# Altium PCB old.PcbDoc
Units mil, origin at the board's own origin, x right, y up, seen from the top; angles counter-clockwise.
Board outline 1180 x 2621.21 mil, 4 copper layers (Top Layer, GND, 3v3, Bottom Layer), stack 23.756 mil thick; 53 components, 48 nets, 259 pads, 57 vias.
Unrouted connection lines stored in the file: 4.
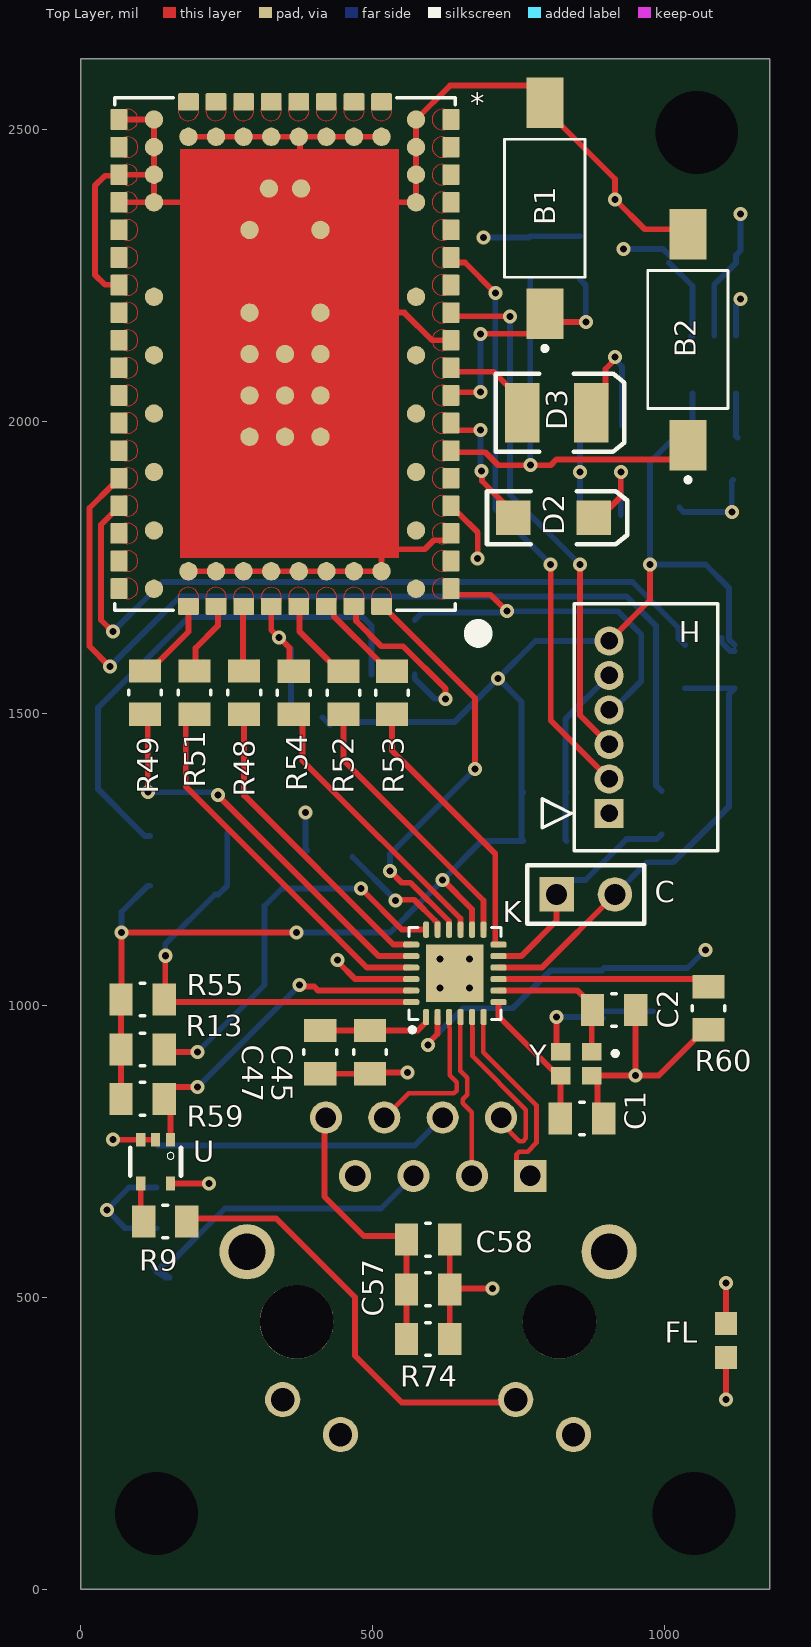
[diagram p0: Top Layer view]
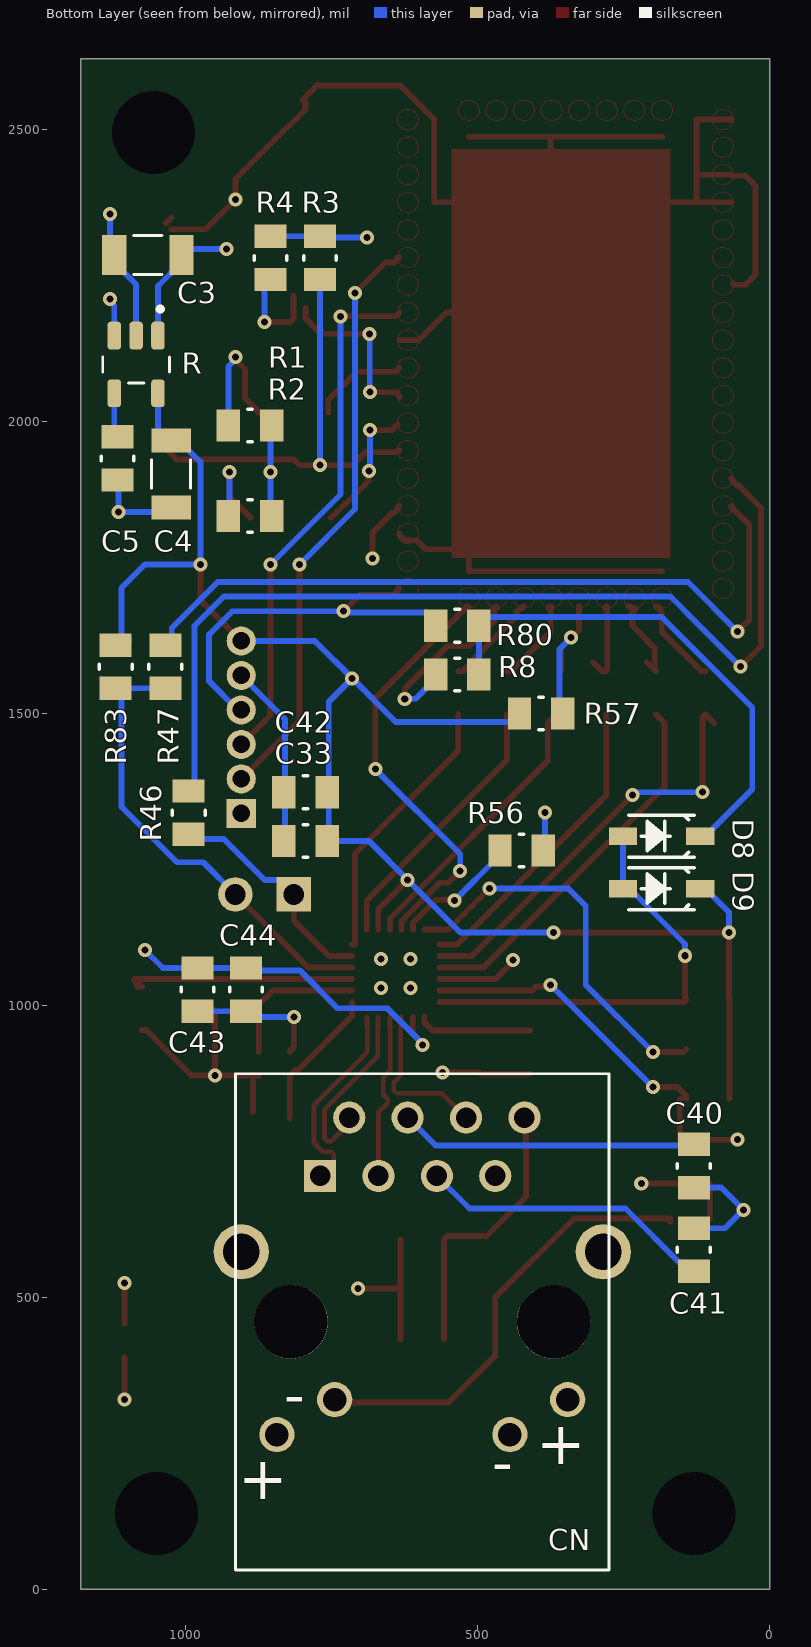
[diagram p1: Bottom Layer view, seen from below]
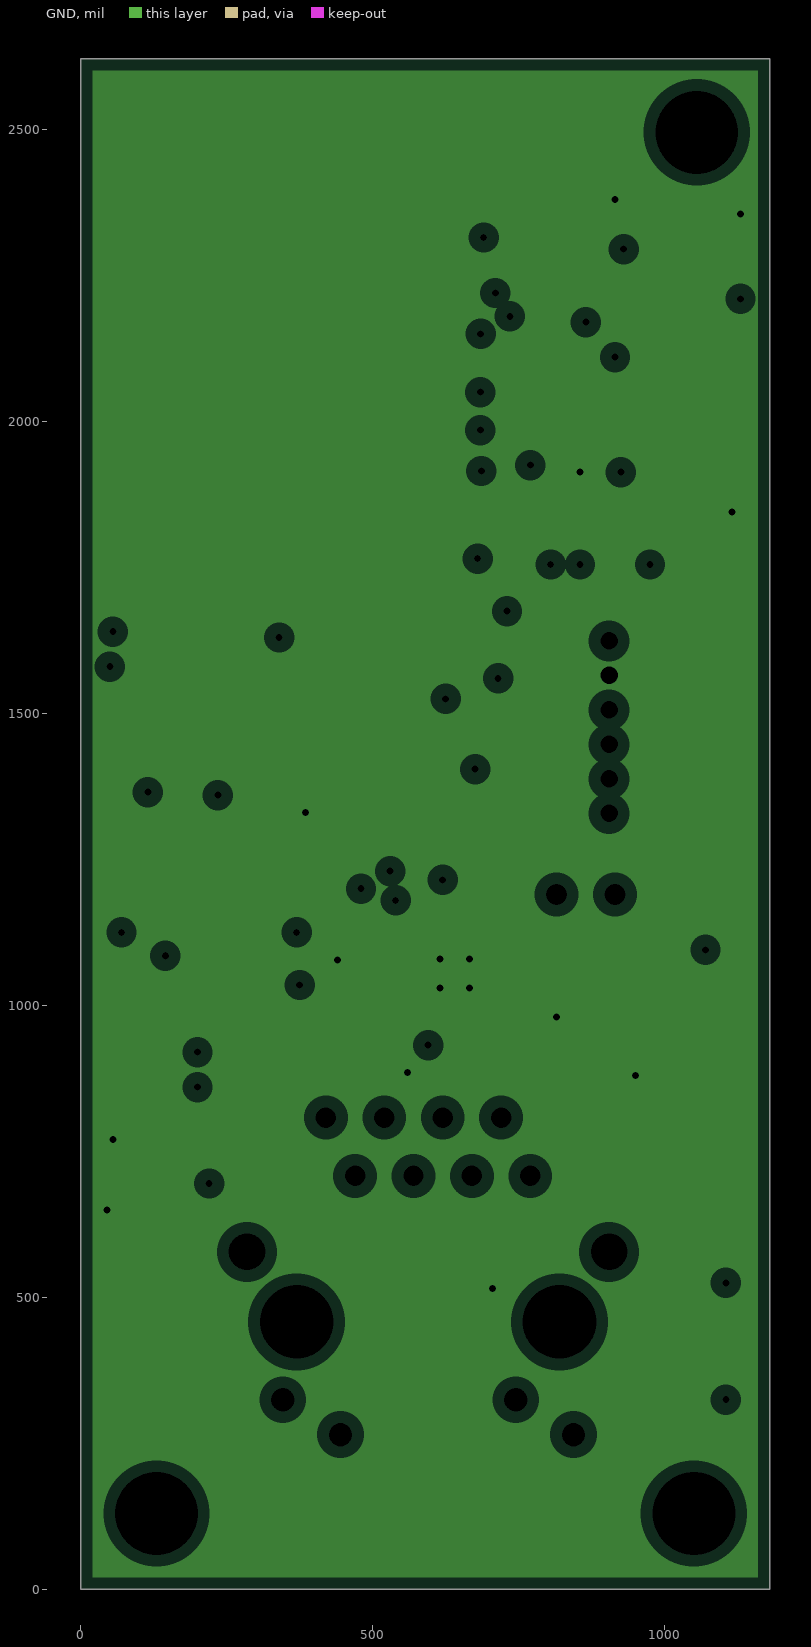
[diagram p2: GND, clearances drawn from the general rule]
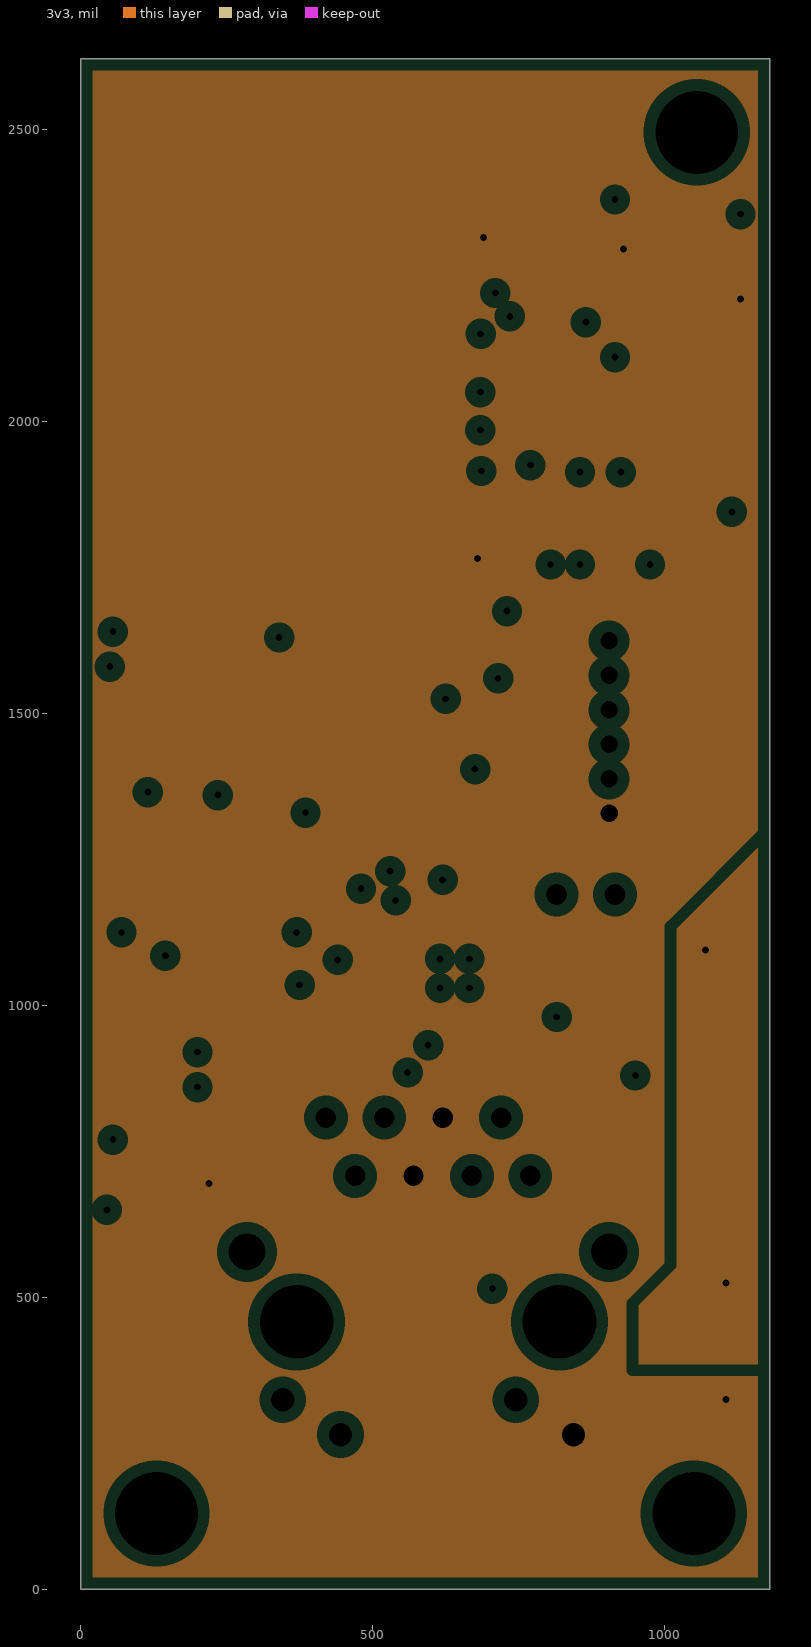
[diagram p3: 3v3, clearances drawn from the general rule]

## Layer stack, top to bottom
Top Solder: solder mask 0.4, Solder Resist, Dk 3.5
Top Layer: signal copper 1.4
Dielectric 2: prepreg 2.8, PP-006, Dk 4.1
GND: plane copper 1.378, net GND
Dielectric 1: dielectric 12.6, FR-4, Dk 4.8
3v3: plane copper 1.378, net 3v3
Dielectric 3: prepreg 2.8, PP-006, Dk 4.1
Bottom Layer: signal copper 1.4
Bottom Solder: solder mask 0.4, Solder Resist, Dk 3.5

## Board outline
0,2621.21 0,0 1180,0 1180,2621.21

## Design rules (kind name [scope] priority, off if disabled: settings)
Clearance [All] p1: gap=5 ignorepadtopadclearanceinfootprint=FALSE // Default=10mil
DiffPairsRouting [All] p1: maxlimit=10 minlimit=10 mostfreqgap=10 toplayer_minwidth=8 toplayer_maxwidth=15 toplayer_prefwidth=15 bottomlayer_minwidth=10 bottomlayer_maxwidth=15 bottomlayer_prefwidth=15 maxuncoupledlength=500 // DefaultMinWidth=15mil
HoleSize [All] p1: absolutevalues=TRUE maxlimit=150 minlimit=1 maxpercent=80.000 minpercent=20.000 // MaximumDefault=100mil
MinimumSolderMaskSliver [All] p1: minsoldermaskwidth=1 // Default=10mil
PlaneClearance [All] p1: clearance=20
PlaneConnect [All] p1: planeconnectstyle=Relief reliefexpansion=20 reliefentries=4 reliefconductorwidth=10 reliefairgap=10
PolygonConnect [All] p1: connectstyle=Relief reliefconductorwidth=10 reliefentries=4 polygonreliefangle="90 Angle" airgapwidth=10
RoutingVias [All] p1: holewidth=28 width=50 viastyle="Through Hole" minholewidth=28 minwidth=50 maxholewidth=28 maxwidth=50
SilkToSolderMaskClearance [IsPad] p1: minsilkscreentomaskgap=4 clearancetoexposedcopper=TRUE // Default=10mil
SolderMaskExpansion [All] p1: expansion=4 istentingtop=FALSE
Width [All] p1: maxlimit=10 minlimit=8 preferedwidth=10 minimp=50.000000 maximp=50.000000 favimp=50.000000 // MinWidthDefault=10mil
24 further rules are at their usual default settings.

## Classes and differential pairs
differential pair PHY_TX: +PHY_TX_P -PHY_TX_N
differential pair PHY_RX: +PHY_RX_P -PHY_RX_N

## Components (designator, comment, footprint, x,y, rotation, side; value= is the part's Value field where it differs from the comment)
* "ODIN-W262" ODIN-W262 349.95,2115.35 r90 top
B1 "push button" TECO-FSMSM 795,2365 r90 top
B2 "push button" TECO-FSMSM 1040,2140 r90 top
C "Header 2" HDR1X2 815,1190 r0 top
C1 "22uF 10V" 0805 858.55,806.51 r0 top value=22uF
C2 "22uF 10V" 0805 913.55,992.31 r0 top value=22uF
C3 "10UF 25V" 1206 1065,2285 r0 bottom value=10uF
C4 "10UF 25V" 1206 1025,1910 r270 bottom value=10uF
C5 "10nF 50V" 0805 1117,1936.69 r270 bottom value=10nF
C33 "2.2uF 16V" 0805 795,1281.72 r180 bottom value=2.2uF
C40 "100nF 50V" 0805 130,725 r90 bottom value=100nF
C41 "100nF 50V" 0805 130,581.49 r270 bottom value=100nF
C42 "100nF 50V" 0805 795,1365 r180 bottom value=100nF
C43 "2.2uF 16V" 0805 980,1027 r90 bottom value=2.2uF
C44 "100nF 50V" 0805 896.72,1027 r90 bottom value=100nF
C45 "100nF 50V" 0805 495.32,920 r90 top value=100nF
C47 "100nF 50V" 0805 410.32,920 r90 top value=100nF
C57 "100nF 50V" 0805 595,513.79 r0 top value=100nF
C58 "100nF 50V" 0805 595,598.79 r0 top value=100nF
CN "CN J00-0045NL" "RJ45 J00-0045NL" 595,457.91 r0 bottom
D2 "LED2" 3.2X1.6X1.1 810,1835 r0 top
D3 "LED3" 3.5X2.8X1.9 815,2015 r0 top
D8 "SM5817PL-TP" SOD-123 185,1290 r0 bottom
D9 "SM5817PL-TP" SOD-123 185,1200 r0 bottom
FL "BLM18PG300SN1D" BEADC1608X95N 1105,426.06 r90 top
H "S6B-ZR(LF)(SN)" S6B-ZR_JST 905,1328.78 r90 top
K "KSZ8081RNAIA-TR" QFN50P400X400X90-25N 640.79,1054.8 r90 top
R "LP2992IM5-1.8" SOT95P280X145-5N 1085,2097.5 r270 bottom
R1 "270" 0805 890,1993 r0 bottom
R2 "270" 0805 890,1838 r0 bottom
R3 "1k" 0805 770,2280 r90 bottom
R4 "1k" 0805 855,2280 r90 bottom
R8 "JUMPER" 0805 535,1566.72 r0 bottom value=0
R9 "120" 0805 145,630 r180 top
R13 "1k" 0805 106,924.46 r180 top
R46 "10.0" 0805 995,1330 r90 bottom
R47 "10.0" 0805 1035,1580 r90 bottom
R48 "10.0" 0805 280,1535.63 r270 top
R49 "10.0" 0805 110,1535.63 r270 top
R51 "10.0" 0805 195,1535.63 r270 top
R52 "10.0" 0805 450,1535.24 r90 top
R53 "10.0" 0805 533.28,1535.24 r90 top
R54 "10.0" 0805 365,1535.24 r90 top
R55 "1k" 0805 106,1010 r180 top
R56 "1k" 0805 425,1265 r180 bottom
R57 "1k" 0805 391.49,1500 r180 bottom
R59 "1k" 0805 106,840 r0 top
R60 "6.8k" 0805 1075,995 r90 top
R74 "16m" 0805 595,428.79 r180 top
R80 "JUMPER" 0805 535,1650 r0 bottom value=0
R83 "4.7k" 0805 1120,1580 r270 bottom
U "NC7SZ125" SC70-5 128.41,732.4 r180 top
Y "ECS-250-10-37-JTN-TR" XTAL_ECS-250-10-37-JTN-TR 848.55,900 r180 top

## Footprints (in the part's own frame and the unit in brackets; to place one, negate y for a bottom-side part, rotate by r counter-clockwise, add the part's x,y. Pads: shape width x height; smd on the part's side, far side on the other; paste and mask are expansions set on the pad)
3.2X1.6X1.1 [mm]
  rect 1.5x1.5 smd: 1(-1.75,0) 2(1.75,0)
  silkscreen extent -2.9,-1.15 3.2,1.15
3.5X2.8X1.9 [mm] "SM LED; 2 C-Bend Leads; Body 3.5 x 2.8 x 1.9 mm, inc leads (LxWxH typ)"
  rect 1.5x2.6 smd: 1(-1.5,0) 2(1.5,0)
  silkscreen extent -2.65,-1.7 2.95,1.7
0805 [mil]
  rect 40x55 smd: 1(-37,0) 2(37,0)
  silkscreen extent -4,-28 4,28
1206 [mm]
  rect 1.05x1.72 smd: 1(-1.46,0) 2(1.46,0)
  silkscreen extent -0.62,-0.85 0.62,0.85
BEADC1608X95N [mm]
  rect 1x0.97 smd: 1(-0.735,0) 2(0.735,0)
HDR1X2 [mm] "Connector; Header; 2 Position"
  rect 1.5x1.5 hole 0.9: 1(0,0)
  round 1.5 hole 0.9: 2(2.54,0)
  silkscreen extent -1.27,-1.27 3.81,1.27
ODIN-W262 [mm]
  round 0.8 smd: 1(6.6,-5.7) 2(7.8,-5.7) 3(9,-5.7) 4(10.2,-5.7) 5(9.45,-4.2) 6(9.45,-3) 7(9.45,-1.8) 8(9.45,-0.6) 9(9.45,0.6) 10(9.45,1.8) 11(9.45,3) 12(9.45,4.2) 13(10.2,5.7) 14(9,5.7) 15(7.8,5.7) 16(6.6,5.7) 17(-9.45,4.2) 18(-9.45,3) 19(-9.45,1.8) 20(-9.45,0.6) 21(-9.45,-0.6) 22(-9.45,-1.8) 23(-9.45,-3) 24(-9.45,-4.2) 25(-3.6,-1.54) 26(-1.8,-1.54) 27(0,-1.54) 28(1.8,-1.54) 29(5.4,-1.54) 30(7.2,-0.7) 31(-3.6,0) 32(-1.8,0) 33(0,0) 34(-3.6,1.54) 35(-1.8,1.54) 36(0,1.54) 37(1.8,1.54) 38(5.4,1.54) 39(7.2,0.7) TP1(2.49,-5.7) TP2(2.49,5.7) TP3(-0.05,-5.7) TP4(-0.05,5.7) TP5(-2.59,-5.7) TP6(-2.59,5.7) TP7(-5.13,-5.7) TP8(-5.13,5.7) TP9(-7.67,-5.7) TP10(-7.67,5.7) TP11(-10.21,-5.7) TP12(-10.21,5.7)
  rrect15% 0.9x0.75 smd paste-1 mask+0: A1(-10.2,-7.225) A2(-9,-7.225) A3(-7.8,-7.225) A4(-6.6,-7.225) A5(-5.4,-7.225) A6(-4.2,-7.225) A7(-3,-7.225) A8(-1.8,-7.225) A9(-0.6,-7.225) A10(0.6,-7.225) A11(1.8,-7.225) A12(3,-7.225) A13(4.2,-7.225) A14(5.4,-7.225) A15(6.6,-7.225) A16(7.8,-7.225) A17(9,-7.225) A18(10.2,-7.225) C1(10.2,7.225) C2(9,7.225) C3(7.8,7.225) C4(6.6,7.225) C5(5.4,7.225) C6(4.2,7.225) C7(3,7.225) C8(1.8,7.225) C9(0.6,7.225) C10(-0.6,7.225) C11(-1.8,7.225) C12(-3,7.225) C13(-4.2,7.225) C14(-5.4,7.225) C15(-6.6,7.225) C16(-7.8,7.225) C17(-9,7.225) C18(-10.2,7.225)
  rrect15% 0.75x0.9 smd paste-1 mask+0: B1(10.975,-4.2) B2(10.975,-3) B3(10.975,-1.8) B4(10.975,-0.6) B5(10.975,0.6) B6(10.975,1.8) B7(10.975,3) B8(10.975,4.2) D1(-10.975,4.2) D2(-10.975,3) D3(-10.975,1.8) D4(-10.975,0.6) D5(-10.975,-0.6) D6(-10.975,-1.8) D7(-10.975,-3) D8(-10.975,-4.2)
  Top Layer circle w0: c10.2,6.85 r0.45
  Top Layer circle w0: c4.2,-6.85 r0.45
  Top Layer circle w0: c3,-6.85 r0.45
  Top Layer circle w0: c5.4,-6.85 r0.45
  Top Layer circle w0: c6.6,-6.85 r0.45
  Top Layer circle w0: c7.8,-6.85 r0.45
  Top Layer circle w0: c9,-6.85 r0.45
  Top Layer circle w0: c10.2,-6.85 r0.45
  Top Layer circle w0: c-9,-6.85 r0.45
  Top Layer circle w0: c-5.4,-6.85 r0.45
  Top Layer circle w0: c1.8,6.85 r0.45
  Top Layer circle w0: c0.6,6.85 r0.45
  Top Layer circle w0: c-0.6,6.85 r0.45
  Top Layer circle w0: c-1.8,6.85 r0.45
  Top Layer circle w0: c-3,6.85 r0.45
  Top Layer circle w0: c-4.2,6.85 r0.45
  Top Layer circle w0: c-7.8,6.85 r0.45
  Top Layer circle w0: c-9,6.85 r0.45
  Top Layer circle w0: c-10.2,6.85 r0.45
  Top Layer circle w0: c9,6.85 r0.45
  Top Layer circle w0: c5.4,6.85 r0.45
  Top Layer circle w0: c4.2,6.85 r0.45
  Top Layer circle w0: c10.6,-4.2 r0.45
  Top Layer circle w0: c10.6,-3 r0.45
  Top Layer circle w0: c10.6,-1.8 r0.45
  Top Layer circle w0: c10.6,-0.6 r0.45
  Top Layer circle w0: c10.6,0.6 r0.45
  Top Layer circle w0: c10.6,1.8 r0.45
  Top Layer circle w0: c10.6,3 r0.45
  Top Layer circle w0: c10.6,4.2 r0.45
  Top Layer lines w0: -4.2,-7.3 cw(c-4.2,-6.85) -4.27,-7.295 cw(c-4.2,-6.85) -4.169,-7.299 cw(c-4.2,-6.85) -4.2,-7.3 ; -4.2,-7.3 ccw(c-4.2,-6.85) -4.2,-7.3 ; -5.414,7.3 ccw(c-5.4,6.85) -5.486,7.292 ccw(c-5.4,6.85) -5.667,6.488 ccw(c-5.4,6.85) -5.4,6.4 ccw(c-5.4,6.85) -5.414,7.3 ; 2.968,7.299 cw(c3,6.85) 3.07,7.295 cw(c3,6.85) 3.131,7.281 cw(c3,6.85) 3,6.4 cw(c3,6.85) 2.968,7.299 ; 7.756,7.298 cw(c7.8,6.85) 7.8,6.4 cw(c7.8,6.85) 7.669,7.281 cw(c7.8,6.85) 7.756,7.298 ; 6.53,7.295 cw(c6.6,6.85) 6.6,6.4 cw(c6.6,6.85) 6.53,7.295 ; -6.731,7.281 cw(c-6.6,6.85) -6.6,6.4 cw(c-6.6,6.85) -6.731,7.281 ; -11.031,4.331 cw(c-10.6,4.2) -10.6,3.75 cw(c-10.6,4.2) -11.045,4.13 cw(c-10.6,4.2) -11.05,4.2 cw(c-10.6,4.2) -11.05,4.207 cw(c-10.6,4.2) -11.047,4.251 cw(c-10.6,4.2) -11.045,4.27 cw(c-10.6,4.2) -11.042,4.286 cw(c-10.6,4.2) -11.031,4.331 ; -11.031,3.131 ccw(c-10.6,3) -11.037,3.107 ccw(c-10.6,3) -11.045,3.07 ccw(c-10.6,3) -11.05,3 ccw(c-10.6,3) -10.6,2.55 ccw(c-10.6,3) -11.031,3.131 ; -11.05,1.8 cw(c-10.6,1.8) -10.6,1.35 cw(c-10.6,1.8) -11.045,1.73 cw(c-10.6,1.8) -11.05,1.8 ; -11.047,0.651 cw(c-10.6,0.6) -10.6,0.15 cw(c-10.6,0.6) -11.031,0.469 cw(c-10.6,0.6) -11.05,0.6 cw(c-10.6,0.6) -11.047,0.651 ; -11.05,-0.6 ccw(c-10.6,-0.6) -11.05,-0.619 ccw(c-10.6,-0.6) -11.031,-0.731 ccw(c-10.6,-0.6) -10.6,-1.05 ccw(c-10.6,-0.6) -11.05,-0.6 ; -11.048,-1.762 cw(c-10.6,-1.8) -10.6,-2.25 cw(c-10.6,-1.8) -11.031,-1.931 cw(c-10.6,-1.8) -11.039,-1.901 cw(c-10.6,-1.8) -11.045,-1.87 cw(c-10.6,-1.8) -11.05,-1.8 cw(c-10.6,-1.8) -11.048,-1.762 ; -11.031,-2.869 cw(c-10.6,-3) -10.6,-3.45 cw(c-10.6,-3) -11.031,-3.131 cw(c-10.6,-3) -11.034,-3.118 cw(c-10.6,-3) -11.042,-3.086 cw(c-10.6,-3) -11.043,-3.076 cw(c-10.6,-3) -11.049,-3.032 cw(c-10.6,-3) -11.05,-3 cw(c-10.6,-3) -11.031,-2.869 ; -11.05,-4.2 cw(c-10.6,-4.2) -10.6,-4.65 cw(c-10.6,-4.2) -10.975,-4.449 cw(c-10.6,-4.2) -11.031,-4.331 cw(c-10.6,-4.2) -11.05,-4.2 ; 0.6,-6.4 cw(c0.6,-6.85) 0.6,-7.3 cw(c0.6,-6.85) 0.6,-6.4 ; -8.067,-6.488 ccw(c-7.8,-6.85) -8.098,-6.513 ccw(c-7.8,-6.85) -7.8,-7.3 ccw(c-7.8,-6.85) -8.067,-6.488 ; -10.069,-7.281 cw(c-10.2,-6.85) -10.114,-7.292 cw(c-10.2,-6.85) -10.2,-7.3 cw(c-10.2,-6.85) -10.27,-7.295 cw(c-10.2,-6.85) -10.069,-7.281 ; -6.731,-7.281 ccw(c-6.6,-6.85) -6.697,-7.289 ccw(c-6.6,-6.85) -6.67,-7.295 ccw(c-6.6,-6.85) -6.613,-7.3 ccw(c-6.6,-6.85) -6.6,-7.3 ccw(c-6.6,-6.85) -6.731,-7.281 ; -3.131,-7.281 ccw(c-3,-6.85) -3.057,-7.296 ccw(c-3,-6.85) -3,-7.3 ccw(c-3,-6.85) -3.131,-7.281 ; -0.514,-7.292 ccw(c-0.6,-6.85) -0.67,-7.295 ccw(c-0.6,-6.85) -0.614,-7.3 ccw(c-0.6,-6.85) -0.6,-7.3 ccw(c-0.6,-6.85) -0.514,-7.292 ; -1.87,-7.295 ccw(c-1.8,-6.85) -1.8,-7.3 ccw(c-1.8,-6.85) -1.787,-7.3 ccw(c-1.8,-6.85) -1.73,-7.295 ccw(c-1.8,-6.85) -1.87,-7.295 ; 1.87,-7.295 ccw(c1.8,-6.85) 1.8,-7.3 ccw(c1.8,-6.85) 1.849,-7.297 ccw(c1.8,-6.85) 1.87,-7.295
  silkscreen extent -12.4,-8.65 11.15,7.4, body extent -11.15,-7.4 11.15,7.4, height 4.8
QFN50P400X400X90-25N [mm]
  rrect70% 0.71x0.27 smd: 1(-1.9,1.25) 2(-1.9,0.75) 3(-1.9,0.25) 4(-1.9,-0.25) 5(-1.9,-0.75) 6(-1.9,-1.25) 13(1.9,-1.25) 14(1.9,-0.75) 15(1.9,-0.25) 16(1.9,0.25) 17(1.9,0.75) 18(1.9,1.25)
  rrect70% 0.27x0.71 smd: 7(-1.25,-1.9) 8(-0.75,-1.9) 9(-0.25,-1.9) 10(0.25,-1.9) 11(0.75,-1.9) 12(1.25,-1.9) 19(1.25,1.9) 20(0.75,1.9) 21(0.25,1.9) 22(-0.25,1.9) 23(-0.75,1.9) 24(-1.25,1.9)
  rect 2.5x2.5 smd paste-2: 25(0,0)
  silkscreen extent -2.55,-2 2,2
"RJ45 J00-0045NL" [mm]
  rect 1.398x1.398 hole 0.89: 1(4.445,-6.35)
  round 1.398 hole 0.89: 2(3.175,-8.89) 3(1.905,-6.35) 4(0.635,-8.89) 5(-0.635,-6.35) 6(-1.905,-8.89) 7(-3.175,-6.35) 8(-4.445,-8.89)
  round 1.53 hole 1.02: 9(6.325,4.9) 10(3.81,3.38) 11(-3.81,4.9) 12(-6.325,3.38)
  round 3.2 hole 3.2 unplated: None(-5.715,0) None(5.715,0)
  round 2.4 hole 1.6: S1(-7.875,-3.05) S2(7.875,-3.05)
  silkscreen extent -8.13,-10.79 8.13,10.79
S6B-ZR_JST [mil]
  rect 50x50 hole 30 mask+0: 1(0,0)
  round 50 hole 30 mask+0: 2(59.06,0) 3(118.11,0) 4(177.17,0) 5(236.22,0) 6(295.28,0)
  silkscreen extent -64,-186 359,115, body extent 0,0 10,10, height 10
SC70-5 [mm]
  rect 0.4x0.6 smd: 1(-0.65,-0.95) 2(0,-0.95) 3(0.65,-0.95) 4(0.65,0.95) 5(-0.65,0.95)
  silkscreen extent -1.1,-0.6 1.1,0.6
SOD-123 [mil]
  rect 48x30 smd: A(66,0) C(-66,0)
  silkscreen extent -56,-36 56,36
SOT95P280X145-5N [mm]
  rrect50% 1.21x0.59 smd: 1(-1.255,0.95) 2(-1.255,0) 3(-1.255,-0.95) 4(1.255,-0.95) 5(1.255,0.95)
  silkscreen extent -2.51,-1.45 0.8,1.45
TECO-FSMSM [mm]
  rect 2.19x1.6 smd: 1(-4.59,0) 2(4.59,0)
  silkscreen extent -6.2,-1.75 3,1.75
XTAL_ECS-250-10-37-JTN-TR [mm]
  rect 0.85x0.75 smd: 1(-0.675,-0.525) 2(0.675,-0.525) 3(0.675,0.525) 4(-0.675,0.525)
  silkscreen extent -1.8,-0.55 -1.6,-0.35

## Part data
B1 B2: library part Teco-FSMSM
C: "Header, 2-Pin", LatestRevisionDate=17-Jul-2002, LatestRevisionNote="Re-released for DXP Platform.", Publisher="Altium Limited"
C1 C2: library part "CAP 22uF 10V", "CAP CER 2.2UF 10V X5R 0805", Operating Temperature="-55°C ~ 85°C", Package=0805, Rating=10V, Temperature Coefficient=X5R, Tolerance=20%
C3 C4: library part "CAP 10uF 25V", "CAP CER 10UF 25V X5R 1206", Operating Temperature="-55°C ~ 85°C", Package=1206, Rating=25V, Temperature Coefficient=X5R, Tolerance=10%
C5: library part "CAP 10nF 50V", "CAP CER 10000PF 50V X7R 0805", Operating Temperature="-55°C ~ 125°C", Package=0805, Rating=50V, Temperature Coefficient=X7R, Tolerance=10%
C33 C43: library part "CAP 2.2uF 16V", "CAP CER 2.2UF 16V X7R 0805", Operating Temperature="-55°C ~ 125°C", Package=0805, Rating=16V, Temperature Coefficient=X7R, Tolerance=10%
C40 C41 C42 C44 C45 C47 C57 C58: library part "CAP 100nF 50V", "CAP CER 0.1UF 50V X7R 0805", Package=0805, Rating=50V, Tolerance=10%
CN: library part "CN MAGJACK", "CN MAGJACK 1PORT 100 BASE-TX", Package=None, Supplier Part Number 1=673-J00-0045NL, Digikey=553-1619-5-ND, Digikey Link=https://www.digikey.com/product-detail/en/pulse-electronics-network/J00-0045NL/553-1619-5-ND/1036860?utm_source=snapeda&utm_medium=aggregator&utm_campaign=symbol, MF="Pulse Electronics", MP=J00-0045NL, SnapEDA_Link=https://www.snapeda.com/parts/J00-0045NL/Pulse%20Electronics%20Network/view-part/87956/?ref=snap, Supplier 1=Mouser
D2: library part "LED RED SMD", "Typical RED, GREEN, YELLOW, AMBER GaAs LED", Color=Red, Current - Test=20mA, Lens Color=Colorless, Package=1206, Voltage - Forward (Vf) (Typ)=1.7V, Lens Transparency=Clear
D3: "Typical BLUE SiC LED", DatasheetVersion=16-Apr-2002, LatestRevisionDate=17-Dec-2003, LatestRevisionNote="PCB Footprint replaced.", PackageDescription="SM LED; 2 C-Bend Leads; Body 3.5 x 2.8 x 1.9 mm, inc leads (LxWxH typ)", PackageReference=3.5X2.8X1.9, PackageVersion=16-Apr-2002, Published=8-Jun-2000, Publisher="Altium Limited"
D8 D9: library part "DIODE SCHOTTKY 20V 1A", "Diode Schottky 20V 1A Surface Mount SOD-123FL", Current Rating=1A, Package=SOD-123, Voltage Rating=20V, ComponentLink1Description=digikey, ComponentLink1URL=https://www.digikey.ca/product-detail/en/on-semiconductor/MBR0540T1G/MBR0540T1GOSCT-ND/917967, Digikey=SM5817PL-TPMSCT-ND, Digikey Link=https://www.digikey.ca/product-detail/en/micro-commercial-co/SM5817PL-TP/SM5817PL-TPMSCT-ND/1793410, MF="Micro Commercial Co", MP=SM5817PL-TP
FL: "30 Ohms @ 100MHz 1 Power Line Ferrite Bead 0603 _1608 Metric_ 1A 50mOhm", Package="1608 Murata", Availability=Unavailable, MF=Murata, MP=BLM18PG300SN1D, Price=None, SnapEDA_Link=https://www.snapeda.com/parts/BLM18PG300SN1D/Murata/view-part/270173/?ref=snap
H: "No Description Available", Built_By=EMA_UL_Team, Copyright="Copyright (C) 2018 Accelerated Designs. All rights reserved", Manufacturer_Part_Number=S6B-ZR(LF)(SN), RefDes=RefDes, SourceLibrary=JST_2017-04-18, Type=DEV, Vendor=JST
K: "1/1 Transceiver Full RMII 24-QFN _4x4_", Package="QFN-24 Microchip", Availability=Unavailable, MF=Microchip, MP=KSZ8081RNAIA-TR, Price=None, SnapEDA_Link=https://www.snapeda.com/parts/KSZ8081RNAIA-TR/Microchip/view-part/482545/?ref=snap
R: Package=None, Availability=Unavailable, MP=LP2992IM5-1.8/NOPB, Price=None
R1 R2: library part "RES 270 1/8W", "RES SMD 270 OHM 5% 1/8W 0805", Package=0805, Power (Watts)=0.125W, Tolerance=5%
R3 R4 R13 R55 R56 R57 R59: library part "RES 1k 1/8W", "RES SMD 1K OHM 5% 1/8W 0805", Package=0805, Power (Watts)=0.125W, Tolerance=5%
R8 R80: library part "RES 0 JUMPER", "RES SMD 0 OHM JUMPER GENERIC 0805", Package=0805
R9: library part "RES 120.0 1/8W", "RES SMD 120 OHM 5% 1/8W 0805", Package=0805, Power (Watts)=0.125W, Tolerance=5%
R46 R47 R48 R49 R51 R52 R53 R54: library part "RES 10.0 1/8W - 5%", "RES SMD 10.0 OHM 5% 1/8W 0805", Package=0805, Power (Watts)=0.125W, Tolerance=5%
R60: library part "RES 6.8k 1/8W", "RES SMD 6.8K OHM 5% 1/8W 0805", Package=0805, Power (Watts)=0.125W, Tolerance=5%
R74: library part "RES 16m 1/2W", "RES SMD 0.016 OHM 1% 1/2W 0805 Thick Film", Case Code (Imperial)=0805, Case Code (Metric)=2012, Manufacturer=Panasonic, Manufacturer Part Number=ERJ-6BWFR016V, Max Operating Temperature=155°C, Max Power Dissipation=500mW, Min Operating Temperature=-55°C, Package Quantity=1, Resistance=16mR, Supplier Part Number 1=P.016AQCT-ND, Temperature Coefficient=200ppm/°C, Tolerance=1%, Case/Package=0805, Category="Chip SMD Resistors", ComponentLink1Description=https://datasheet.ciiva.com/11808/0900766b8126441d-11808690.pdf?src-supplier=RSComponents, ComponentLink1URL=https://datasheet.ciiva.com/11808/0900766b8126441d-11808690.pdf?src-supplier=RSComponents, ComponentLink2Description=https://datasheet.ciiva.com/2452/aoa0000ce3-2452594.pdf?src-supplier=Digi-Key, ComponentLink2URL=https://datasheet.ciiva.com/2452/aoa0000ce3-2452594.pdf?src-supplier=Digi-Key, ComponentLink3Description=https://datasheet.ciiva.com/2452/aoa0000ce3-2452592.pdf?src-supplier=Digi-Key, ComponentLink3URL=https://datasheet.ciiva.com/2452/aoa0000ce3-2452592.pdf?src-supplier=Digi-Key, ComponentLink4Description=https://datasheet.ciiva.com/2452/aoa0000ce3-2452593.pdf?src-supplier=Digi-Key, ComponentLink4URL=https://datasheet.ciiva.com/2452/aoa0000ce3-2452593.pdf?src-supplier=Digi-Key, ComponentLink5Description=https://datasheet.ciiva.com/9192/aoa0000ce3-9192761.pdf?src-supplier=Avnet, ComponentLink5URL=https://datasheet.ciiva.com/9192/aoa0000ce3-9192761.pdf?src-supplier=Avnet, ComponentLink6Description=https://datasheet.ciiva.com/17211/aoa0000ce3-17211370.pdf?src-supplier=Avnet+Europe, ComponentLink6URL=https://datasheet.ciiva.com/17211/aoa0000ce3-17211370.pdf?src-supplier=Avnet+Europe, Composition="Thick Film", Contact Plating=Tin, Depth=1.25mm, Features="Automotive AEC-Q200", Height=0.028inch, Lead Free="Lead Free", Length=2mm, Military Standard=Not, Mount="Surface Mount", Number of Pins=2, Number of Terminations=2, Packaging="Tape and Reel", Power Rating=500mW, Pricing 1="1=0.65000, 10=0.53800, 100=0.36140, 1000=0.21148, 2500=0.20917 (USD)", Radiation Hardening=No, RoHS=Yes, Stock 1=4585, Supplier 1=Digi-Key, Termination=SMD/SMT, Width=0.049inch
R83: library part "RES 4.7k 1/8W - 5%", "RES SMD 4.7k OHM 5% 1/8W 0805", Package=0805, Power (Watts)=0.125W, Tolerance=5%
U: "Buffer, Non-Inverting 1 Element 1 Bit per Element 3-State Output SC-70-5", Package="SC-70 ON Semiconductor", Availability=Unavailable, MF="ON Semiconductor", MP=NC7SZ125, Price=None, SnapEDA_Link=https://www.snapeda.com/parts/NC7SZ125/ON%20Semiconductor/view-part/2686816/?ref=snap
Y: "SMD Crystal 2.0 x 1.6 x 0.45 mm ceramic package", Package=None, Availability=Unavailable, MP=ECS-250-10-37-JTN-TR, Price=None

## Free pads (board coordinates)
  round 125.98 hole 142 unplated: 6(130,130) 6(1050,130) 6(1055,2495)

## Via types
v1: diameter 24, hole 12, Top Layer to Bottom Layer, 57 vias

## Nets (pads, with @x,y where several pads share a name; then routed paths per layer and width w, separated by ;. In a path a pad name is that pad's centre, name@x,y a point inside that pad or via, vN(x,y) a via of type N, cw(c..) or ccw(c..) an arc to the next point about the centre after c; other vN are vias at no path point)
1v8: C4.1 C33.2 C42.2 D9.C H.6 K.14 R13.2 R55.2 R57.1 R59.1 R83.1 R.5 | length 2884.3
  Top Layer w10: R59.1 R13.2 R55.2 70,1011 v1(70,1125) v1(370,1125) ; v1(620,1215) 670.31,1164.68 K.14 ; H.6 975,1694.06 v1(975,1755)
  Bottom Layer w10: v1(70,1125) 70,1160 115,1205 D9.C@119,1205 ; v1(370,1125) 530,1125 585,1180 617.32,1212.32 686.72,1281.72 C33.2 755,1284.72 755,1362 C42.2 755,1368 755,1520 v1(715,1560) ; R57.1@414,1493.39 R57.1@427,1480.39 ; R57.1 443.49,1485 640,1485 v1(715,1560) ; H.6 779.06,1624.06 v1(715,1560) ; C4.1 1011.81,1967.48 975,1930.67 v1(975,1755) 1070,1755 1110,1715 1110,1627 R83.1 ; C4.1@1030,1967.48 1031.93,1967.48 1047.6,1983.15 R.5 ; R83.1@1097.5,1629.5 1097.5,1622 1112.5,1607 R83.1@1120,1607
3v3: *.A4 C3.1 C40.2 C41.2 CN.4 CN.5 CN.9 FL.1 H.1 R3.2 R4.2 R.1 R.3 U.5 | length 1798.6
  Top Layer w10: U.5 v1(220,695) ; *.A4 634.5,1855.5 *.A4@638.11,1851.89 ; *.A4@636.59,1850.36 644.16,1842.79 647.21,1842.79 680,1810 v1(680,1765) ; v1(1105,325) FL.1
  Bottom Layer w10: C40.2 132,760 572.09,760 CN.4 ; C41.2@142.15,536.62 131.15,542.52 C41.2 ; C41.2@144.85,533.92 152.5,533.92 147.36,537.51 144.28,539.67 132.39,547.98 124.99,553.03 C41.2 ; CN.5 514.23,652.15 247.15,652.15 154.49,559.49 145,559.49 C41.2 ; v1(690,2315) 768,2315 R3.2 R4.2 ; v1(930,2295) 997.52,2295 C3.1 ; C3.1@1007.52,2271.81 1047.6,2231.73 R.1 ; R.1@1046.11,2136.19 R.1@1046.11,2146.91 ; R.3 1122.4,2198.61 1130,2206.21 v1(1130,2210)
BlueLED: *.A9 D3.1 | length 166
  Top Layer w10: *.A9 635.88,2090.25 636.14,2089.98 637.14,2088.99 641.12,2085 707.04,2085 730.86,2061.18 731.42,2061.18 755.94,2036.65 D3.1
BYPASS: C5.1 R.4 | length 77.2
  Bottom Layer w10: R.4 1122.4,1974.6 C5.1@1125,1972
CRS_DV: K.15 R54.1 | length 486.9
  Top Layer w10: R54.1 380,1483.24 380,1418.91 650.31,1148.59 650.31,1129.92 K.15
Diode_2: D2.2 R2.2 | length 166
  Top Layer w10: D2.2@888.9,1835 925,1871.1 v1(925,1913)
  Bottom Layer w10: R2.2@925,1840 v1(925,1913)
Diode_3: D3.2 R1.2 | length 233.9
  Top Layer w10: D3.2 898.58,2039.53 898.58,2089.79 915,2106.21 v1(915,2110)
  Bottom Layer w10: v1(915,2110) 915,2106.21 927,2094.21 R1.2
ETH_CRSDV: *.D4 R54.2 R57.2 | length 266.8
  Top Layer w10: *.D4 326.33,1680.31 326.33,1642.86 340,1629.19 v1@340,1627.65 ; v1(340,1630) 357.5,1612.5 R54.2@357.5,1572.24
  Bottom Layer w10: v1(340,1630) 360,1610 360,1505.51 R57.2
ETH_MDC: C.1 K.11 R46.1 | length 399.3
  Top Layer w10: K.11 754.33,1084.33 815,1145 C.1 ; C.1@830,1185 C.1@835,1190
  Bottom Layer w10: C.1 839.53,1214.53 864.53,1214.53 935,1285 987,1285 R46.1
ETH_MDIO: C.2 K.10 R47.1 R83.2 | length 805.6
  Top Layer w10: K.10 789.65,1064.65 C.2 ; C.2@930,1190 C.2@935,1190
  Bottom Layer w10: C.2 970,1245 1015,1245 1110,1340 1110,1533 R83.2 R47.1
ETH_REFCLK: *.D8 K.16 | length 732.1
  Top Layer w10: *.D8 518.26,1683.26 520.45,1681.07 675.46,1526.06 v1(675.46,1404.54) ; v1(530,1230) 550,1210 565,1210 630.63,1144.37 K.16@630.63,1129.92
  Bottom Layer w10: v1(530,1230) 530,1259.08 v1(675.46,1404.54)
ETH_RXD0: *.D5 R52.2 | length 151
  Top Layer w10: *.D5@373.57,1680.31 *.D5@374.37,1680.31 ; *.D5 375,1681.83 375,1640 427.5,1587.5 427.5,1587.24 442.5,1572.24 R52.2 ; *.D5@376.53,1683.26 *.D5@378.72,1681.07
ETH_RXD1: *.D6 R53.2 | length 163.7
  Top Layer w10: *.D6 421.51,1682.56 423.56,1680.52 426.51,1680.52 433.53,1673.5 433.53,1666.47 510.78,1589.22 510.78,1587.24 525.78,1572.24 R53.2
ETH_TXD0: *.D1 R49.1 | length 152.1
  Top Layer w10: R49.1 117.5,1572.63 184.8,1639.93 184.8,1673.5 188.46,1677.16 188.46,1679.4 192.19,1683.12 192.32,1683.26 *.D1@195.28,1683.26
ETH_TXD1: *.D2 R51.1 | length 156.3
  Top Layer w10: R51.1@210,1587.63 R51.1 196.77,1574.41 196.77,1611.77 235,1650 235,1678.69 237.41,1681.11 239.57,1683.26 *.D2@242.52,1683.26 ; *.D2@229.69,1678.15 *.D2@231.84,1680.31
ETH_TXEN: *.D3 R48.1 | length 144.3
  Top Layer w10: *.D3@281.82,1680.52 *.D3 278.18,1682.35 278.18,1574.46 R48.1 285,1572.63 287.5,1572.63 R48.1@302.5,1587.63
GND: *.1 *.2 *.3 *.4 *.5 *.6 *.7 *.8 *.9 *.10 *.11 *.12 *.13 *.14 *.15 *.16 *.17 *.18 *.19 *.20 *.21 *.22 *.23 *.24 *.25 *.26 *.27 *.28 *.29 *.30 *.31 *.32 *.33 *.34 *.35 *.36 *.37 *.38 *.39 *.A3 *.A10 *.C1 *.C3 *.C4 *.C7 B1.2 B2.2 C1.2 C2.2 C3.2 C4.2 C5.2 C33.1 C40.1 C41.1 C42.1 C43.1 C44.1 C45.1 C47.1 C57.2 C58.2 H.5 K.22 K.25 R1.1 R2.1 R56.2 R60.1 R74.1 R.2 U.2 U.3 Y.2 Y.4 | length 6453.6
  Top Layer w10: v1(55,770) 55.1,769.9 102.72,769.9 U.3 U.2 ; *.C7@62.76,2236.2 60.69,2234.12 60.5,2233.94 41.6,2233.94 24.32,2251.21 24.32,2403.43 41.6,2420.7 62.63,2420.7 63.77,2420.7 *.C3 97.98,2422.43 *.15 ; *.C4 97.98,2375.19 *.16 ; *.C1 97.98,2516.92 *.13 *.14 *.15 ; *.17 *.18 *.19 *.20 *.21 *.22 *.23 *.24 515.3,1781.21 ; *.12 *.11 *.10 *.9 *.8 ; *.37 *.36 *.33 ; C47.1 C45.1 497.32,885 v1(560,885) ; *.26@414.32,2041.21 411.05,2044.48 *.26 *.32 ; v1(440,1078.11) 440,1075 470.04,1044.96 K.22 ; *.5 *.6 *.7 *.8 ; R74.1 C57.2 ; C58.2 C57.2 ; *.A3 634.4,1806.29 624.64,1796.53 606.36,1796.53 604.64,1796.53 589.32,1781.21 520.3,1781.21 515.3,1786.21 ; *.A10 601.92,2138.97 601.56,2138.97 554.32,2186.21 *.28 ; v1@700,515 633.21,515 C57.2 ; B1.2 795,2534.09 821.5,2507.6 822.4,2507.6 915,2415 v1(915,2380) 966.07,2328.93 B2.2@1024.81,2328.93 ; B1.2@800,2550.71 775.71,2575 632.44,2575 *.4 *.3 *.2 *.1 457.82,2375.19 *.29 ; v1(815,980) 815,927.65 Y.2 ; Y.4 875.46,879.67 949.67,879.67 v1(950,880) ; C1.2@885,817.06 Y.4@885,869.57 ; C2.2@950,991.76 v1(950,880) ; B2.2@1024.74,2348.22 B2.2@1034.04,2338.93 ; R60.1 1067.5,958 1052.5,943 1052.5,942.5 990,880 v1(950,880) ; *.16 242.08,2375.19 *.38 322.39,2361.02 *.39 *.30 ; *.16 *.15 ; *.32 *.35 *.34 *.31 *.25 515.3,1868.89 515.3,1786.21 ; *.32 *.33 ; *.33 *.27 *.28 ; *.8 375.54,2485.43 375.54,2400.78 *.30 ; *.30 377.51,2361.02 *.29 ; *.28 *.29 ; 515.3,1781.21 515.3,1786.21 ; 515.3,1781.21 515.3,1786.21
  Bottom Layer w10: C41.1 76.51,618.49 v1(45,650) 83,688 C40.1 ; v1(385,1330) 385,1268 R56.2 ; v1(815,980) 892.57,980 C44.1@894.57,978 ; C33.1 830,1283.72 830,1363 C42.1 830,1367 830,1490 H.5 ; R2.1@855,1840 v1(855,1913) R1.1@855,1986 ; C44.1 C43.1 ; C4.2 1032.52,1845 v1(1115,1845) 1115,1897.69 C5.2 ; R.2 1085,2234.33 1122.48,2271.81 C3.2 1130,2292.52 v1(1130,2355)
  other v1: 705,515 615.47,1029.8 665.47,1029.8 615.47,1079.8 665.47,1079.8
INTRP: K.18 R13.1 | length 674.7
  Top Layer w10: R13.1 147.46,920 v1(200,920) ; v1(480,1200) 550,1130 591.26,1130 591.26,1129.92 K.18
  Bottom Layer w10: v1(200,920) 315,1035 315,1170 345,1200 v1(480,1200)
INV_TO_RJ45: CN.10 R9.1 | length 772.3
  Top Layer w10: R9.1@171,630 R9.1@176,635 ; R9.1@171,635 247.22,635 247.45,635.24 334.76,635.24 470,500 470,400 550,320 740.16,320 CN.10
JUMPERS: D8.C R8.1 R80.1 | length 883.8
  Bottom Layer w10: D8.C 110,1290 100,1300 30,1370 30,1510 185,1665 483,1665 R80.1 R8.1
KSZ_RST_OUT: D8.A D9.A K.24 R55.1 | length 758.1
  Top Layer w10: v1(145,1085) 145,1012 R55.1 147.41,1005.59 K.24
  Bottom Layer w10: v1(145,1085) 145,1105 230,1190 236,1190 251,1205 D8.A@251,1295
MAIN_RESET: *.A1 H.4 R80.2 | length 677.3
  Top Layer w10: *.A1 *.A1@637.35,1713.77 ; *.A1@637.14,1711.03 637.14,1710.29 644.16,1703.27 701.73,1703.27 v1(730,1675)
  Bottom Layer w10: R80.2@572,1660 584.5,1672.5 727.5,1672.5 v1(730,1675) 920,1675 960,1635 960,1555 910.94,1505.94 H.4
NetR9_2: R9.2 U.4 | length 62.2
  Top Layer w10: R9.2@102.82,632.82 U.4
PHY_LED0: K.23 R59.2 U.1 | length 581.3
  Top Layer w10: R59.2 143,845 158,860 v1(200,860) ; R59.2@153,840 154,839 U.1 ; v1(375,1035) 377.68,1032.32 399.95,1032.32 407,1025.28 K.23
  Bottom Layer w10: v1(200,860) v1(375,1035)
PHY_RX_N: CN.6 K.3 | length 274.1
  Top Layer w8: CN.6 561.52,849.43 639.11,849.43 643.8,854.12 643.8,868.3 631.79,880.31 631.79,961.93 631.31,962.4 631.31,979.63 K.3
PHY_RX_P: CN.3 K.4 | length 287.1
  Top Layer w8: K.4 650.26,979.63 650.26,962.4 649.79,961.93 649.79,887.77 661.8,875.75 661.8,846.66 654.2,839.06 654.2,832.43 670,816.63 CN.3
PHY_TX_N: CN.2 K.5 | length 312.5
  Top Layer w8: K.5 670.69,979.63 670.69,962.4 671.16,961.93 671.16,912.65 762.48,821.32 762.48,772.21 757.79,767.53 751.17,767.53 720,798.69 CN.2
PHY_TX_P: CN.1 K.6 | length 342.3
  Top Layer w8: K.6 689.63,979.63 689.63,962.4 689.16,961.93 689.16,920.1 780.48,828.78 780.48,764.76 765.25,749.53 751.17,749.53 746.48,744.84 746.48,731.43 CN.1
RedLED: *.A7 D2.1 | length 229.1
  Top Layer w10: *.A7@637.21,1995 647.21,1985 v1(684.32,1985) ; v1(686.1,1915) 687.14,1913.96 687.14,1897.86 725.47,1859.53 726.57,1859.53 D2.1@751.1,1835
  Bottom Layer w10: v1(684.32,1985) 684.66,1984.66 684.66,1915.34 v1@685,1915
REXT: K.9 R60.2 | length 412.8
  Top Layer w10: K.9 R60.2@1087.96,1044.96 ; R60.2@1087.96,1044.96 1082.92,1031.71 R60.2 R60.2@1087.96,1044.96
RJ_45_GND: C57.1 C58.1 CN.8 R74.2 | length 474
  Top Layer w10: CN.8@417.54,805.45 417.54,672.46 485,605 551.79,605 C58.1 C57.1 R74.2
RMII_MDC: *.C14 R46.2 | length 1652.2
  Top Layer w10: v1(50,1580) 15,1615 15,1851.89 53.14,1890.03 55.74,1890.03 62.87,1897.17 62.87,1899.38 65.5,1902.01 *.C14
  Bottom Layer w10: v1(50,1580) 128.84,1658.84 170,1700 935,1700 985,1650 985,1377 R46.2
RMII_MDIO: *.C15 R47.2 | length 1308.4
  Top Layer w10: v1(55,1640) 35,1660 35,1823.08 54.7,1842.79 55.74,1842.79 61.84,1848.89 *.C15@61.84,1851.84 ; *.C15@63.31,1850.36 65.5,1852.55 *.C15
  Bottom Layer w10: v1(55,1640) 140,1725 945,1725 1023.86,1646.14 1023.86,1628.14 R47.2
RST_D7: *.D7 R8.2 | length 323.9
  Top Layer w10: *.D7@468.06,1680.31 473.2,1680.31 *.D7@473.97,1680.31 ; *.D7@468.06,1680.56 468.06,1680.93 *.D7 ; *.D7@471.79,1680.31 471.79,1658.21 515,1615 552.16,1615 625,1542.16 v1(625,1525)
  Bottom Layer w10: R8.2 572,1559.22 606.22,1525 v1(625,1525)
RXD0: K.13 R52.1 | length 475.1
  Top Layer w10: R52.1@445,1493.24 R52.1 450,1419.54 690,1179.54 K.13
RXD1: K.12 R53.1 | length 472.8
  Top Layer w10: R53.1 533.28,1436.26 570.23,1399.31 675,1294.54 710,1259.54 710,1104.33 710.31,1104.02 K.12
RXER: K.17 R56.1 | length 204.9
  Top Layer w10: v1(539.5,1180) 540.43,1180.93 571.5,1180.93 606.89,1145.55 610.94,1141.49 610.94,1129.92 K.17
  Bottom Layer w10: R56.1@465.43,1254.07 v1(539.5,1180)
SWITCH0: *.A6 B2.1 R3.1 | length 747.2
  Top Layer w10: *.A6 *.A6@637.35,1949.99 ; *.A6@637.14,1947.25 *.A6@637.31,1947.25 ; *.A6@637.35,1947.25 692.75,1947.25 715,1925 v1(770,1925) 805,1925 815,1935 1015.71,1935 B2.1
  Bottom Layer w10: v1(770,1925) R3.1
SWITCH1: *.A8 B1.1 R4.1 | length 452
  Top Layer w10: *.A8@634.4,2041.53 *.A8 637.14,2047.22 639.92,2050 v1(684.32,2050) ; v1(685,2150) 768.5,2150 795,2176.5 B1.1@795,2194.29 ; B1.1@815.71,2215 815.71,2175.79 821.5,2170 v1(865,2170)
  Bottom Layer w10: v1@685,2060 v1(685,2150) ; R4.1 865,2233 v1(865,2170)
TXD0: K.20 R49.2 | length 724.2
  Top Layer w10: R49.2@95,1483.63 R49.2 115,1493.63 v1(115,1365) ; v1(235,1360) 510.67,1084.33 K.20
  Bottom Layer w10: v1(115,1365) 230,1365 v1(235,1360)
TXD1: K.21 R51.2 | length 644.4
  Top Layer w10: R51.2 180,1483.63 180,1375 490.35,1064.65 K.21
TXEN: K.19 R48.2 | length 530.8
  Top Layer w10: R48.2 280,1359.7 535.68,1104.02 K.19
UART_RXD: *.A13 H.2 | length 1024.4
  Top Layer w10: *.A13@637.35,2280.7 *.A13 643.15,2271.95 658.05,2271.95 v1(710,2220) ; v1(805,1755) 805,1487.83 H.2
  Bottom Layer w10: v1(710,2220) 710,1850 v1(805,1755) ; H.2 H.2@912.75,1387.83
UART_TXD: *.A11 H.3 | length 924.7
  Top Layer w10: *.A11 640.61,2180 v1(735,2180) ; v1(855,1755) 855,1496.89 H.3 H.3@897.84,1446.89
  Bottom Layer w10: v1(735,2180) 735,1875 v1(855,1755) ; H.3 H.3@915.82,1446.89
VDD_1v2: C45.2 C47.2 K.1 | length 195.9
  Top Layer w10: C47.2 C45.2 577.24,957 591.57,971.34 K.1
VDDA_3.3: C43.2 C44.2 FL.2 K.2 | length 669.2
  Top Layer w10: v1(595,931.89) 595,934.76 611.26,951.02 K.2 ; FL.2 v1(1105,525)
  Bottom Layer w10: v1(595,931.89) 595,935 655,995 740,995 805,1060 892.72,1060 C44.2 C43.2 1039,1064 v1(1070,1095)
X0: C1.1 K.7 Y.3 | length 245.2
  Top Layer w10: K.7 715.59,981.42 807.92,889.09 812.21,889.09 Y.3 C1.1@821.98,806.93
X1: C2.1 K.8 Y.1 | length 249.2
  Top Layer w10: K.8 851.09,1025.28 876.55,999.81 C2.1 ; Y.1 C2.1@875.13,990.89
pads on no net: *.A2 *.A5 *.A12 *.A14 *.A15 *.A16 *.A17 *.A18 *.B1 *.B2 *.B3 *.B4 *.B5 *.B6 *.B7 *.B8 *.C2 *.C5 *.C6 *.C8 *.C9 *.C10 *.C11 *.C12 *.C13 *.C16 *.C17 *.C18 *.TP1 *.TP2 *.TP3 *.TP4 *.TP5 *.TP6 *.TP7 *.TP8 *.TP9 *.TP10 *.TP11 *.TP12 CN.7 CN.11 CN.12 CN.None CN.S1 CN.S2

## Polygon pours and split planes (outlines as drawn)
GND on GND (split plane): 1159.9,20.1 20.1,20.1 20.1,2601.12 1159.9,2601.12
3v3 on 3v3 (split plane): 1159.9,1299.17 1002.87,1142.13 1001.27,1140.04 1000.26,1137.61 999.91,1135 999.91,559.18 937.87,497.13 936.27,495.04 935.26,492.61 934.91,490 934.91,375 935.26,372.39 936.27,369.96 937.87,367.87 939.96,366.26 942.39,365.26 945,364.91 1159.9,364.91 1159.9,20.1 20.1,20.1 20.1,2601.12 1159.9,2601.12
VDDA_3.3 on 3v3 (split plane): 1159.9,385.09 955.09,385.09 955.09,485.82 1017.13,547.87 1018.73,549.96 1019.24,551.17 1019.74,552.39 1020.09,555 1020.09,1130.82 1159.9,1270.64

## Other copper
Top Layer:
  rectangle net GND: 170,1766.21 545,2466.21
3v3 (plane layer: these items are gaps in the copper):
  lines w20: 1175,1365 1175,1300 1010,1135 1010,555 945,490 945,375 1180,375 1180,350

## Silkscreen, mask and mechanical layers (free items; w line width, h text height)
Mechanical 1:
  lines w10: 0,0 1175,0 1175,2621.21 0,2621.21 0,0

## Text inside footprints (layer, text, board x,y; h text height)
CN: Mechanical 4 "12" at 289.77,402.71 h73.82 r180; Mechanical 4 "11" at 424.63,347.5 h73.82 r180; Mechanical 4 "10" at 705.39,412.56 h73.82 r180; Mechanical 4 "9" at 840.47,347.52 h73.82 r180; Mechanical 4 "FRONT" at 532.32,204.52 h73.82 r180; Mechanical 4 "RIGHT" at 306.54,78.96 h73.82 r180; Mechanical 4 "LEFT" at 795.88,78.55 h73.82 r180; Mechanical 4 "2" at 745.52,793.89 h73.82 r180; Mechanical 4 "4" at 645.12,793.52 h73.82 r180; Mechanical 4 "6" at 544.71,794.63 h73.82 r180; Mechanical 4 "8" at 444.34,794.2 h73.82 r180; Mechanical 4 "7" at 494.66,693.52 h73.82 r180; Mechanical 4 "5" at 595,693.94 h73.82 r180; Mechanical 4 "3" at 695.28,693.39 h73.82 r180; Mechanical 4 "1" at 795.97,693.85 h73.82 r180; Mechanical 4 "12" at 289.77,402.71 h73.82 r180; Mechanical 4 "11" at 424.63,347.5 h73.82 r180; Mechanical 4 "10" at 705.39,412.56 h73.82 r180; Mechanical 4 "9" at 840.47,347.52 h73.82 r180; Mechanical 4 "FRONT" at 532.32,204.52 h73.82 r180; Mechanical 4 "RIGHT" at 306.54,78.96 h73.82 r180; Mechanical 4 "LEFT" at 795.88,78.55 h73.82 r180; Mechanical 4 "2" at 745.52,793.89 h73.82 r180; Mechanical 4 "4" at 645.12,793.52 h73.82 r180; Mechanical 4 "6" at 544.71,794.63 h73.82 r180; Mechanical 4 "8" at 444.34,794.2 h73.82 r180; Mechanical 4 "7" at 494.66,693.52 h73.82 r180; Mechanical 4 "5" at 595,693.94 h73.82 r180; Mechanical 4 "3" at 695.28,693.39 h73.82 r180; Mechanical 4 "1" at 795.97,693.85 h73.82 r180; Bottom Overlay "+" at 315,277.91 h73.82 r180; Bottom Overlay "-" at 439.62,237.19 h73.82 r180; Bottom Overlay "-" at 795,352.91 h73.82 r180; Bottom Overlay "+" at 825,217.91 h73.82 r180